# Altium PCB EtherWiz_RiscPC7K.PcbDoc (part 1 of 2)
Units mil, origin at the board's own origin, x right, y up, seen from the top; angles counter-clockwise.
Board outline 2881.89 x 2411.42 mil, 4 copper layers (Top Layer, 5V, GND, Bottom Layer), stack 81.148 mil thick; 69 components, 129 nets, 423 pads, 162 vias.
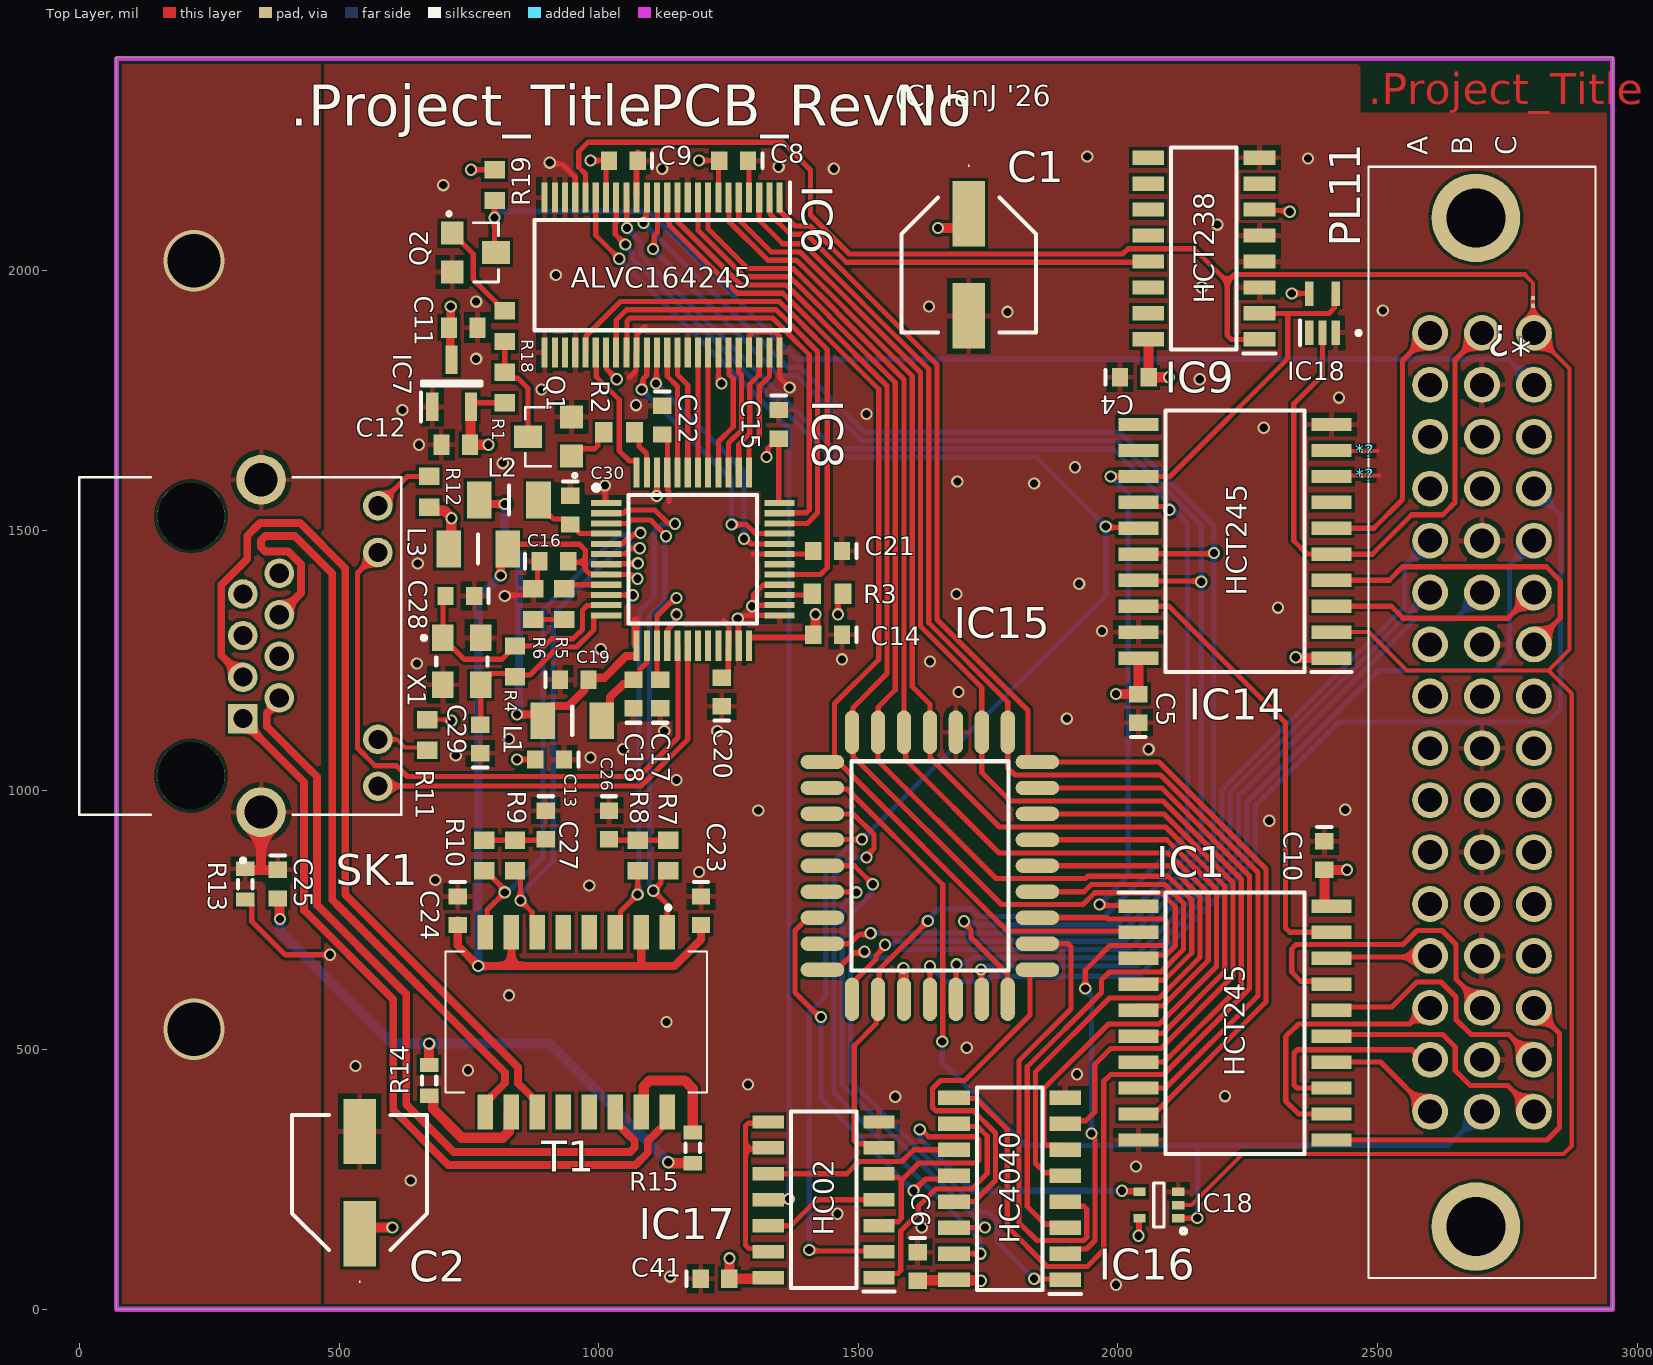
[diagram p0: Top Layer view]
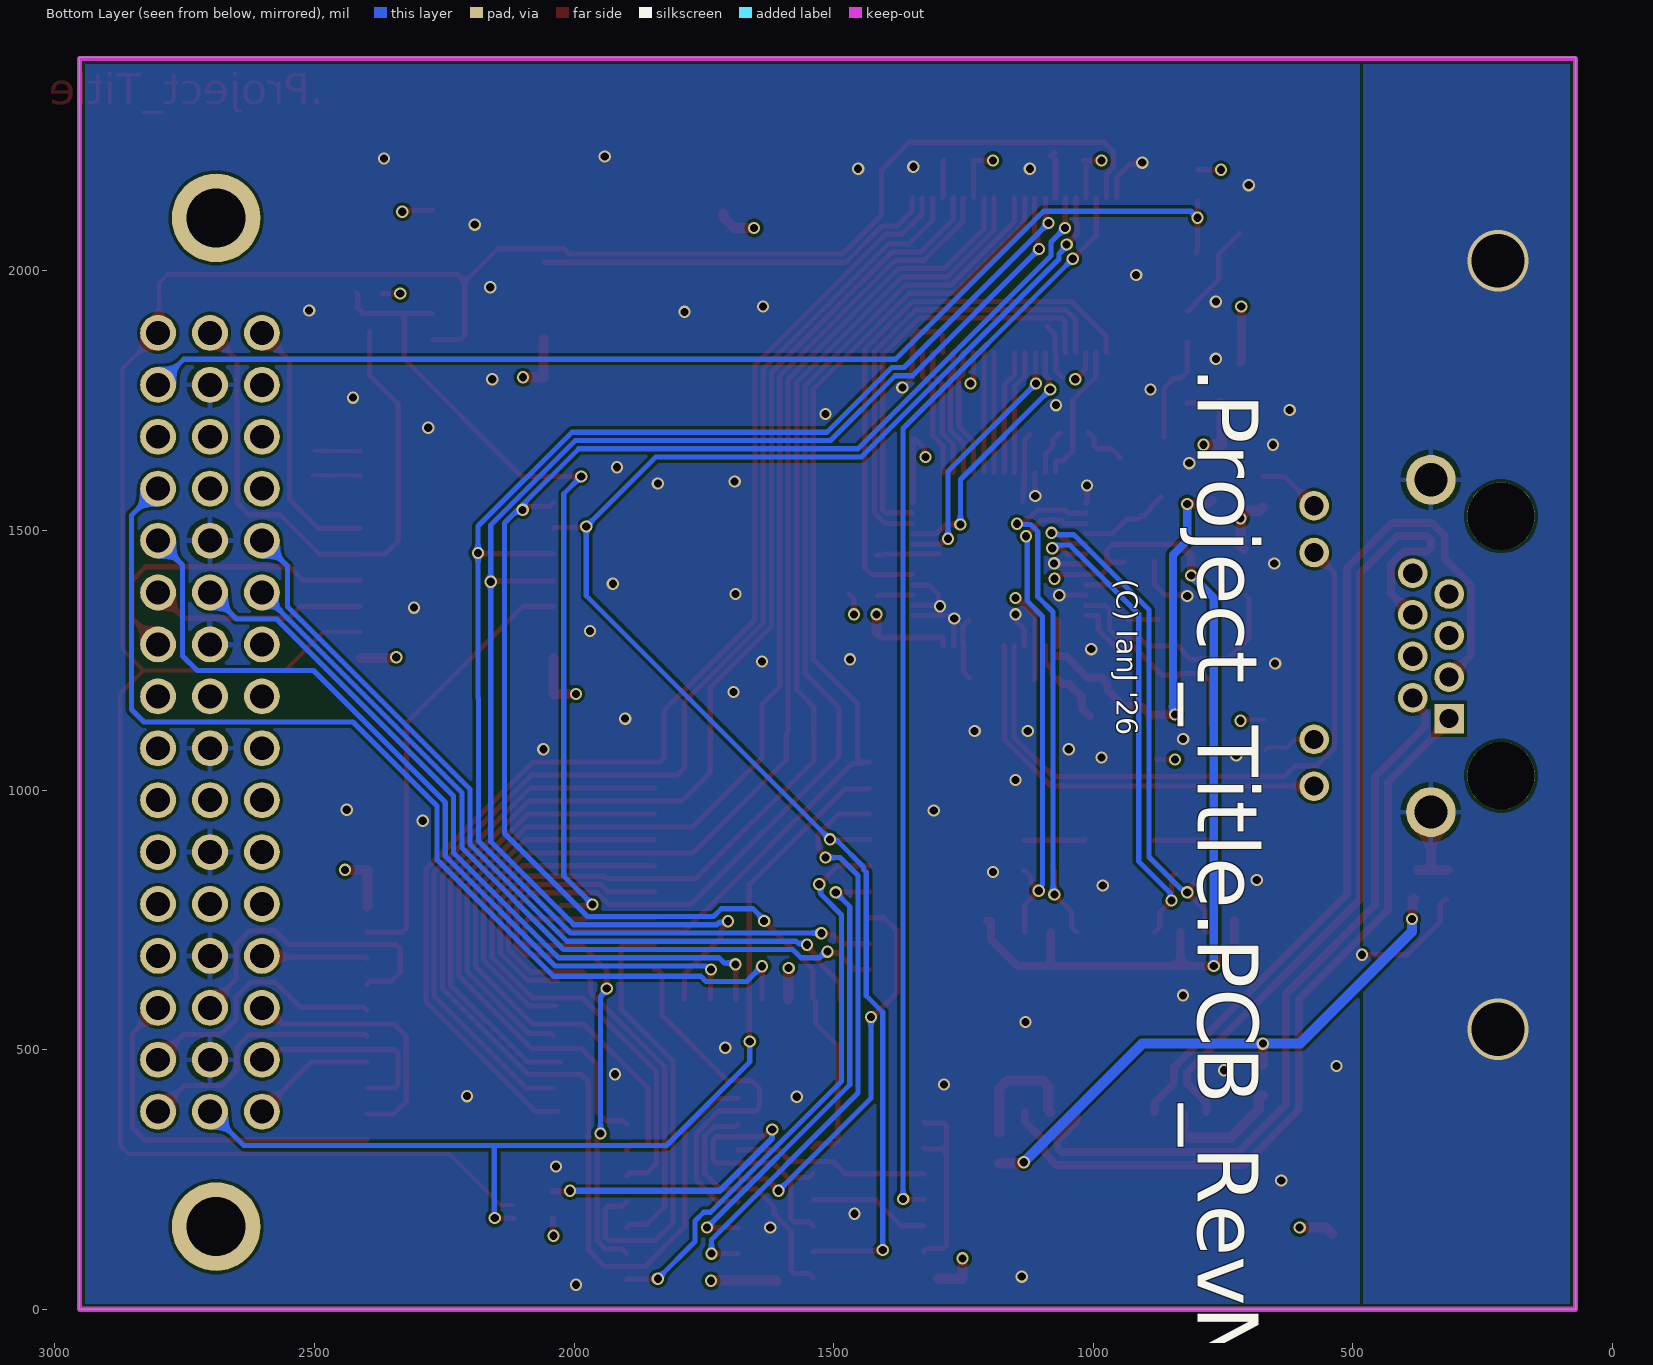
[diagram p1: Bottom Layer view, seen from below]
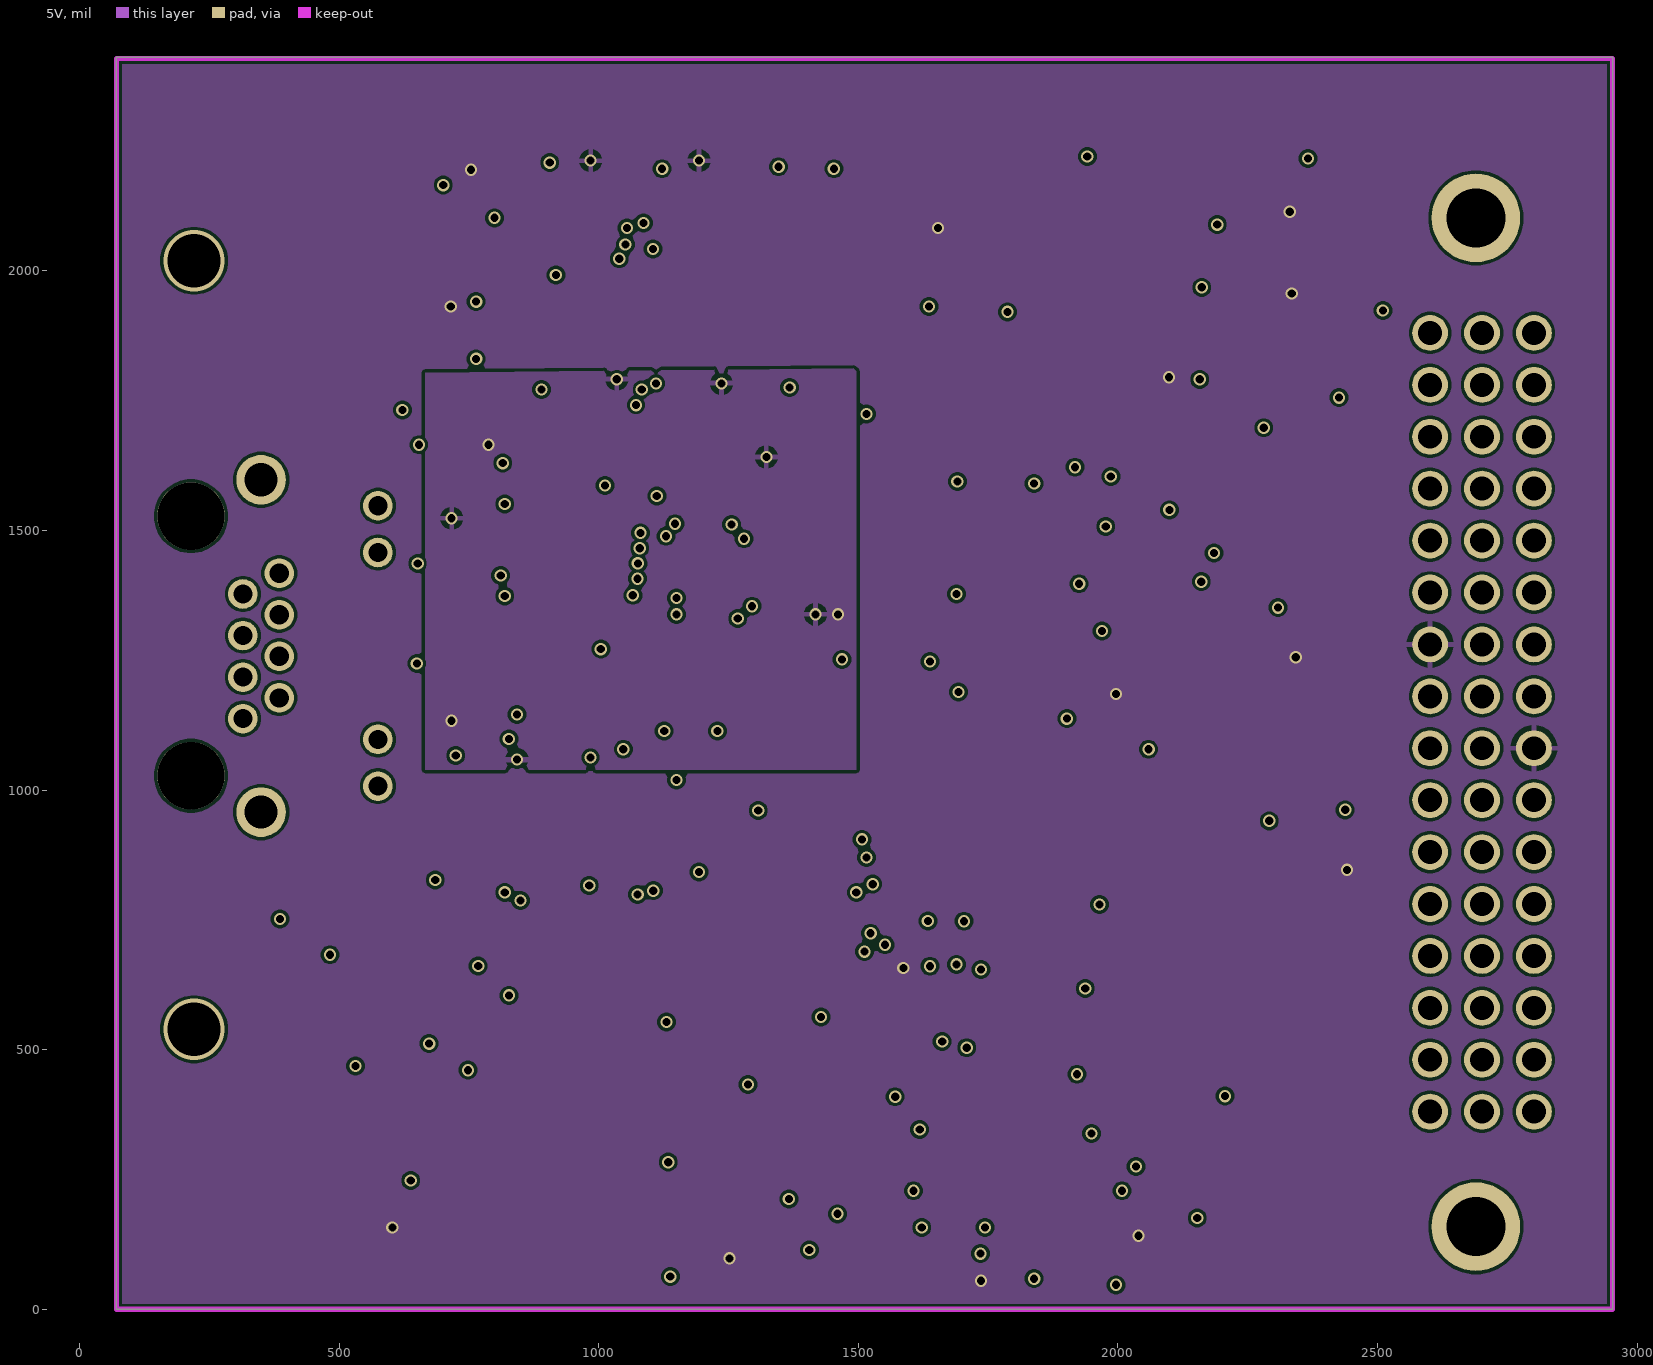
[diagram p2: 5V]
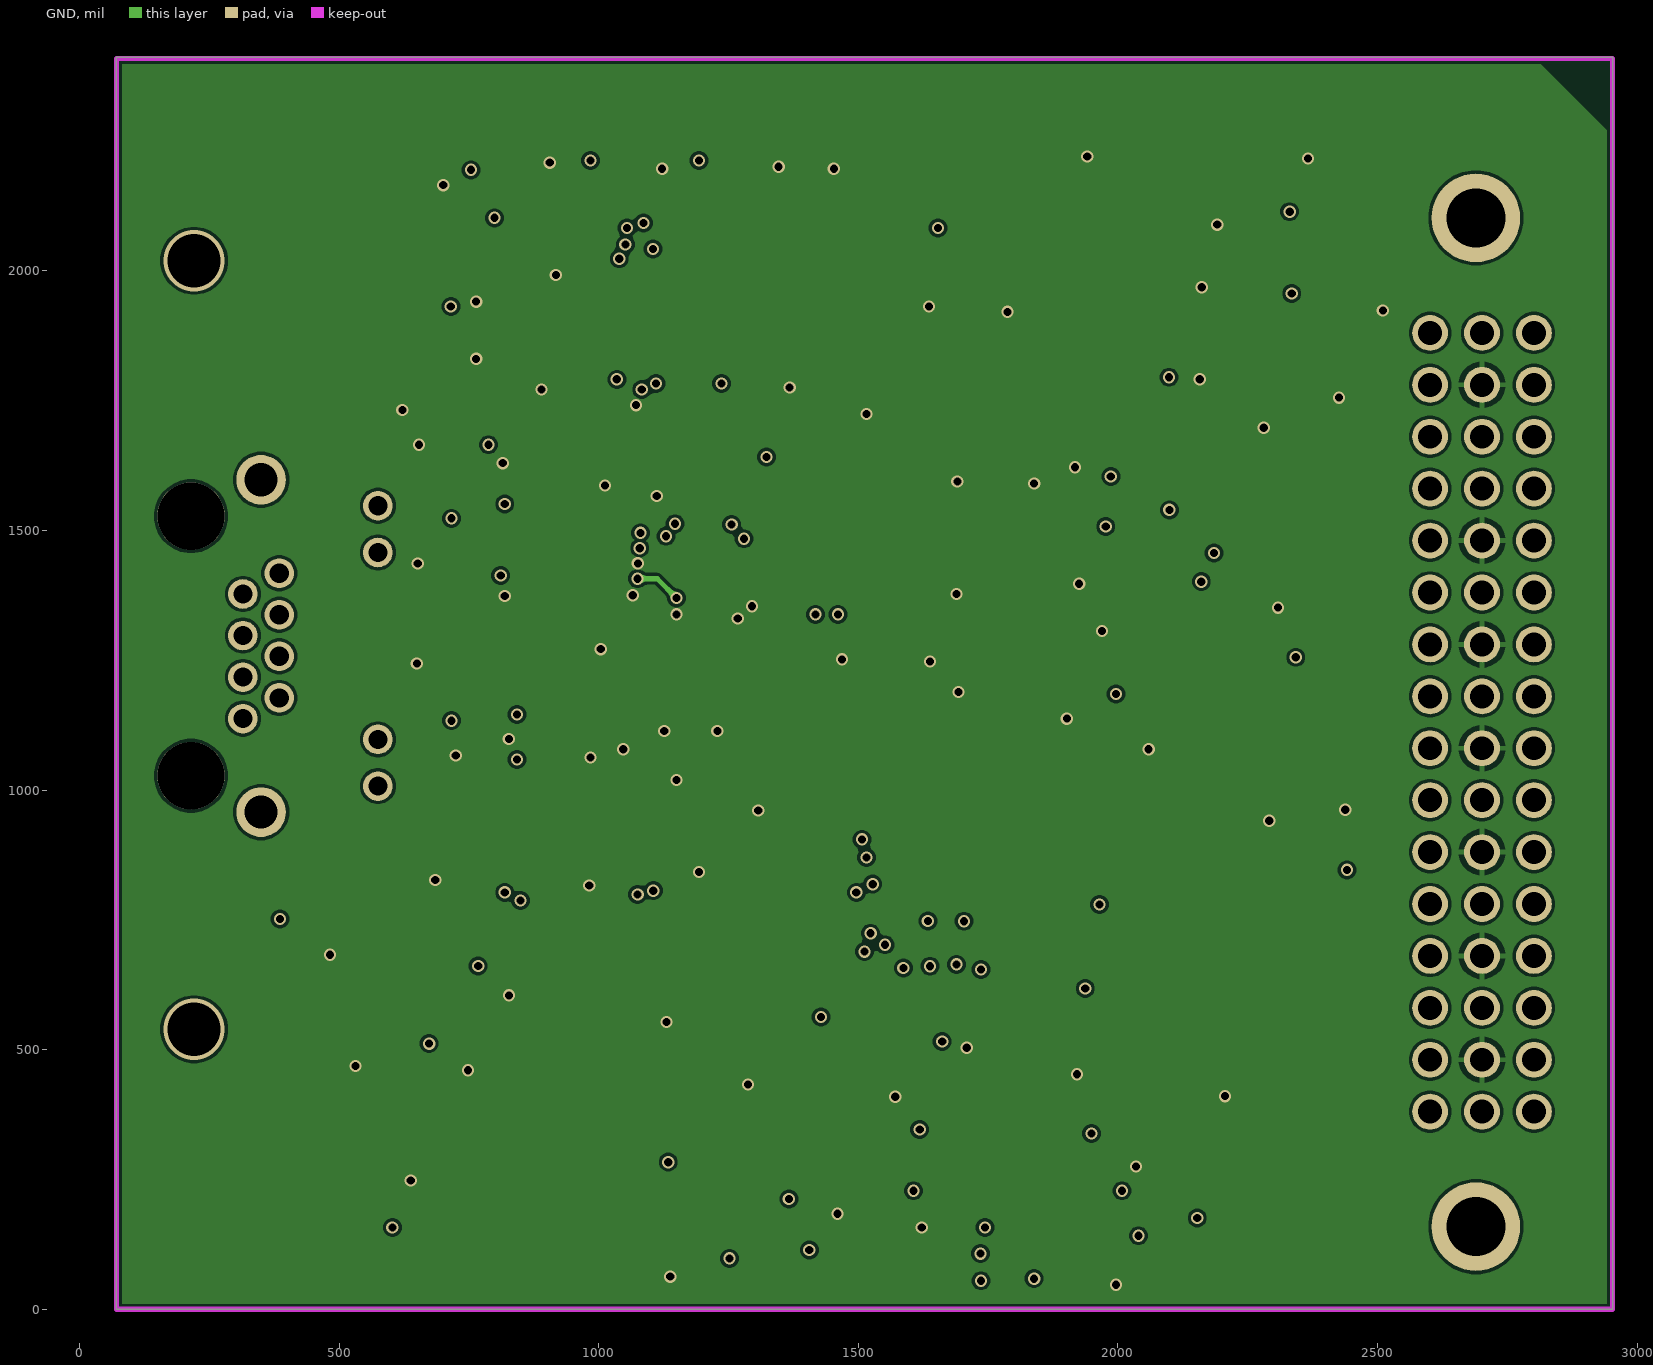
[diagram p3: GND]
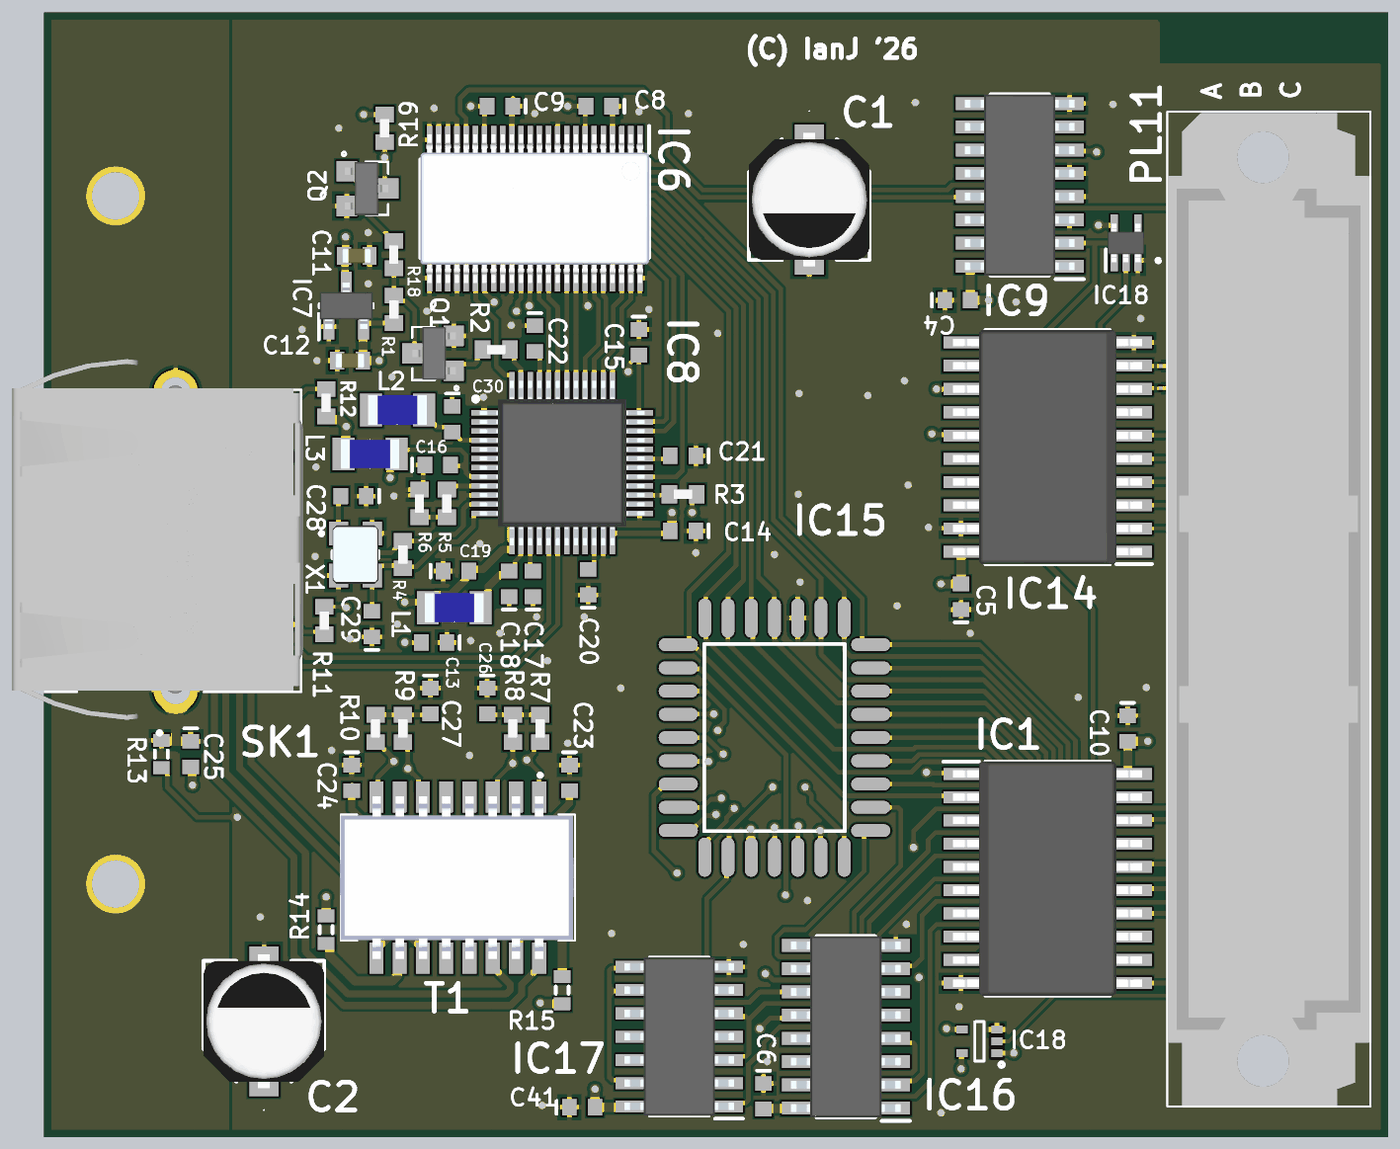
[diagram p5: 3D render of the assembled board from above, using the file's embedded part models]

## Layer stack, top to bottom
Top Solder: solder mask 0.4, Solder Resist, Dk 3.5
Top Layer: signal copper 1.4
Dielectric 1: dielectric 7.874, FR-4, Dk 4.8
5V: signal copper 1.378
Dielectric 2: core 47.2441, PP-006, Dk 4.1
Dielectric2: dielectric 7.874, FR-4, Dk 4.8
GND: signal copper 1.378
Dielectric4: dielectric 12.6, FR-4, Dk 4.8
Bottom Layer: signal copper 1.4
Bottom Solder: solder mask 0.4, Solder Resist, Dk 3.5

## Board outline
70.87,0 70.87,2411.42 2952.76,2411.42 2952.76,0

## Design rules (kind name [scope] priority, off if disabled: settings)
Clearance [All] p1: gap=5.91 ignorepadtopadclearanceinfootprint=FALSE
DiffPairsRouting [All] p1: maxlimit=10 minlimit=10 mostfreqgap=10 toplayer_minwidth=15 toplayer_maxwidth=15 toplayer_prefwidth=15 midlayer1_minwidth=15 midlayer1_maxwidth=15 midlayer1_prefwidth=15 midlayer2_minwidth=15 midlayer2_maxwidth=15 midlayer2_prefwidth=15 bottomlayer_minwidth=15 bottomlayer_maxwidth=15 bottomlayer_prefwidth=15 maxuncoupledlength=500
HoleSize [All] p1: absolutevalues=TRUE maxlimit=196.85 minlimit=1 maxpercent=80.000 minpercent=20.000
MinimumSolderMaskSliver [All] p1: minsoldermaskwidth=0.79
PolygonConnect [All] p1: connectstyle=Relief reliefconductorwidth=10 reliefentries=4 polygonreliefangle="90 Angle" airgapwidth=10
RoutingVias [All] p1: holewidth=15.75 width=23.62 viastyle="Through Hole" minholewidth=15.75 minwidth=23.62 maxholewidth=28 maxwidth=50
SilkToSilkClearance [All] p1 off: silktosilkclearance=10
SilkToSolderMaskClearance [IsPad] p1 off: minsilkscreentomaskgap=10 clearancetoexposedcopper=TRUE
SolderMaskExpansion [All] p1: expansion=4 istentingtop=FALSE
SupplyNets "Schematic Supply Nets_8" [InNet('GND_CHASS')] p1: voltage=0.000
SupplyNets "Schematic Supply Nets_7" [InNet('1v2a')] p2: voltage=0.000
SupplyNets "Schematic Supply Nets_6" [InNet('3v3a')] p3: voltage=0.000
SupplyNets "Schematic Supply Nets_5" [InNet('5V')] p4: voltage=0.000
SupplyNets "Schematic Supply Nets_4" [InNet('1v2o')] p5: voltage=0.000
SupplyNets "Schematic Supply Nets_3" [InNet('3v3')] p6: voltage=0.000
SupplyNets "Schematic Supply Nets_2" [InNet('1v2d')] p7: voltage=0.000
SupplyNets "Schematic Supply Nets" [InNet('GND')] p8: voltage=0.000
Width [All] p1: maxlimit=19.68 minlimit=7.87 preferedwidth=10 midlayer1_maxwidth=10 midlayer2_maxwidth=10 minimp=50.000000 maximp=50.000000 favimp=50.000000
25 further rules are at their usual default settings.

## Classes and differential pairs
component class EtherWiz_RiscPC7K: *? IC15 IC16 IC17 IC18 PL11
component class EtherWiz_Controller: C6 C11 C12 C13 C14 C15 C16 C17 C18 C19 C20 C21 C22 C23 C24 C25 C26 C27 C28 C29 C30 IC6 IC7 IC8 L1 L2 L3 Q1 Q2 R1 R2 R3 R4 R5 R6 R7 R8 R9 R10 R11 R12 R13 R14 R15 R18 R19 SK1 T1 X1
component class EtherWiz: C1 C2 C4 C5 C8 C9 C10 C41 IC1 IC9 IC14
differential pair TX: +TX_P -TX_N
differential pair RX: +RX_P -RX_N
differential pair ETX: +ETX_P -ETX_N
differential pair ERX: +ERX_P -ERX_N

## Components (designator, comment, footprint, x,y, rotation, side; value= is the part's Value field where it differs from the comment)
*? "NetTie" nettie 2799.21,1948.07 r180 top net-tie
*? "NetTie" nettie 2483.5,1606.3 r90 top net-tie
*? "NetTie" nettie 2483.5,1653.54 r90 top net-tie
C1 "EEE-HA1C470AP" EEE1AA101SP 1712.6,2011.81 r270 top
C2 "EEE-HA1C470AP" EEE1AA101SP 539.37,244.09 r90 top
C4 "100n" CAPC1608L 2031.5,1795.28 r0 top
C5 "100n" CAPC1608L 2039.37,1157.48 r90 top
C6 "100n" CAPC1608L 1614.17,82.68 r270 top
C8 "100n" CAPC1608L 1259.84,2212.6 r180 top
C9 "100n" CAPC1608L 1047.24,2212.6 r180 top
C10 "100n" CAPC1608L 2397.64,874.02 r270 top
C11 "1uF" CAPC1608X90N 738.98,1890.88 r180 top
C12 "1uF" CAPC1608X90N 724.41,1665.35 r0 top
C13 "100n" CAPC1608L 905.51,1059.06 r180 top
C14 "100n" CAPC1608L 1440.94,1299.21 r180 top
C15 "100n" CAPC1608L 1346.46,1704.72 r270 top
C16 "100n" CAPC1608L 913.39,1440.94 r0 top
C17 "100n" CAPC1608L 1118.11,1185.04 r90 top
C18 "100nF" CAPC1608L 1066.93,1185.04 r90 top
C19 "100nF" CAPC1608L 952.76,1212.6 r0 top
C20 "100nF" CAPC1608L 1236.81,1188.92 r90 top
C21 "100nF" CAPC1608L 1440.94,1460.63 r180 top
C22 "100nF" CAPC1608L 1122.05,1712.6 r270 top
C23 "100nF" CAPC1608L 1196.85,767.72 r270 top
C24 "100nF" CAPC1608L 728.35,767.72 r270 top
C25 "1nF" CAPC1608L 381.89,818.9 r270 top
C26 "100nF" CAPC1608L 1019.69,933.07 r270 top
C27 "100nF" CAPC1608L 897.64,933.07 r270 top
C28 "24pF" CAPC1608L 732.28,1374.02 r180 top
C29 "24pF" CAPC1608L 771.65,1098.43 r90 top
C30 "100nF" CAPC1608L 944.88,1539.37 r270 top
C41 "100n" CAPC1608L 1224.02,59.06 r0 top
IC1 "SN74HCT245DWR" SOIC127P1030X265-20N 2225.39,551.18 r0 top
IC6 "74ALVC164245DGG_11" SOP50P810X120-48N 1122.05,1992.13 r270 top
IC7 "MCP1703AT-3302E_CB" SOT95P255X145-3N 716.54,1783.46 r90 top
IC8 "W6100L" QFP50P900X900X160-48N 1181.1,1444.88 r0 top locked
IC9 "CD74HCT238M96" SOIC127P600X175-16N 2165.35,2043.31 r180 top
IC14 "SN74HCT245DWR" SOIC127P1030X265-20N 2225.39,1479.33 r180 top
IC15 "SST39SF040" PLCC127P1245X1499X356-32N 1637.8,854.33 r180 top locked
IC16 "74HC4040D,652" SOIC127P600X175-16N 1791.34,232.28 r180 top
IC17 "74HC02D,652" SOIC127P600X175-14N 1433.09,211.02 r180 top
IC18 "74LVC1G08" SOT353 2078.74,200.79 r180 top
IC18 "SN74LVC1G04DCKR" SOT65P210X110-5N 2393.89,1918.65 r90 top
L1 "782763800" INDC3216X130N 948.82,1133.86 r180 top
L2 "782763800" INDC3216X130N 826.77,1559.06 r0 top
L3 "782763800" INDC3216X130N 767.72,1464.57 r0 top
PL11 "5650479-5" 56504795 2601.18,1880.71 r90 top locked
Q1 "BC846" SOT-23 905.51,1681.1 r90 top
Q2 "BC846" SOT-23 759.84,2035.43 r270 top
R1 "100K" RESC1608X50N 818.9,1775.59 r270 top
R2 "2K2" RESC1608X50N 1039.37,1688.98 r180 top
R3 "2K2" RESC1608X50N 1440.94,1377.95 r0 top
R4 "1M" RESC1608X50N 838.58,1248.03 r90 top
R5 "12K" RESC1608X50N 933.07,1358.27 r90 top
R6 "300R" RESC1608X50N 874.02,1358.27 r270 top
R7 "50R" RESC1608X50N 1133.86,874.02 r270 top
R8 "50R" RESC1608X50N 1074.8,874.02 r270 top
R9 "50R" RESC1608X50N 838.58,874.02 r270 top
R10 "50R" RESC1608X50N 779.53,874.02 r270 top
R11 "300R" RESC1608X50N 669.29,1106.3 r90 top
R12 "300R" RESC1608X50N 673.23,1574.8 r270 top
R13 "0R" RESC1608L 318.9,818.9 r90 top
R14 "75R" RESC1608L 673.23,440.94 r270 top
R15 "75R" RESC1608L 1181.1,311.02 r90 top
R18 "2K2" RESC1608X50N 818.9,1893.7 r90 top
R19 "100K" RESC1608X50N 799.21,2165.35 r90 top
SK1 "RJHSE5480" AMPHENOL_RJHSE5480 214.57,1277.76 r270 top locked
T1 "PT61017PEL" PT61017PEL 956.69,578.74 r180 top locked
X1 "25MHz" ABM810000MHZ12D2W 736.22,1248.03 r270 top

## Footprints (in the part's own frame and the unit in brackets; to place one, negate y for a bottom-side part, rotate by r counter-clockwise, add the part's x,y. Pads: shape width x height; smd on the part's side, far side on the other; paste and mask are expansions set on the pad)
56504795 [mm]
  round 1.755 hole 1.17: A1(0,0) A2(-2.54,0) A3(-5.08,0) A4(-7.62,0) A5(-10.16,0) A6(-12.7,0) A7(-15.24,0) A8(-17.78,0) A9(-20.32,0) A10(-22.86,0) A11(-25.4,0) A12(-27.94,0) A13(-30.48,0) A14(-33.02,0) A15(-35.56,0) A16(-38.1,0) B1(0,-2.54) B2(-2.54,-2.54) B3(-5.08,-2.54) B4(-7.62,-2.54) B5(-10.16,-2.54) B6(-12.7,-2.54) B7(-15.24,-2.54) B8(-17.78,-2.54) B9(-20.32,-2.54) B10(-22.86,-2.54) B11(-25.4,-2.54) B12(-27.94,-2.54) B13(-30.48,-2.54) B14(-33.02,-2.54) B15(-35.56,-2.54) B16(-38.1,-2.54) C1(0,-5.08) C2(-2.54,-5.08) C3(-5.08,-5.08) C4(-7.62,-5.08) C5(-10.16,-5.08) C6(-12.7,-5.08) C7(-15.24,-5.08) C8(-17.78,-5.08) C9(-20.32,-5.08) C10(-22.86,-5.08) C11(-25.4,-5.08) C12(-27.94,-5.08) C13(-30.48,-5.08) C14(-33.02,-5.08) C15(-35.56,-5.08) C16(-38.1,-5.08)
  round 4.335 hole 2.89: MH1(-43.725,-2.24) MH2(5.625,-2.24)
  silkscreen extent -46.23,-8.09 8.13,3.6, body extent -46.17,-8.05 8.07,2.97, height 11.57
ABM810000MHZ12D2W [mm]
  rect 1.3x1.05 smd: 1(-1.15,-0.925) 2(1.15,-0.925) 3(1.15,0.925) 4(-1.15,0.925)
  silkscreen extent -1.25,-1.95 0.2,1.25, body extent -1.6,-1.25 1.6,1.25, height 0.8
AMPHENOL_RJHSE5480 [mm]
  rect 1.448x1.448 / inner round 1.448 / far side rect 1.448x1.448 hole 0.94: 1(3.556,2.54)
  round 1.448 hole 0.94: 2(2.54,4.318) 3(1.524,2.54) 4(0.508,4.318) 5(-0.508,2.54) 6(-1.524,4.318) 7(-2.54,2.54) 8(-3.556,4.318) 9(6.858,9.144) 10(4.572,9.144) 11(-4.572,9.144) 12(-6.858,9.144)
  round 2.43 hole 1.62: S1(-8.13,3.43) S2(8.13,3.43)
  round 3.3 hole 3.3 unplated: ""(-6.35,0) ""(6.35,0)
  silkscreen extent -8.26,-5.46 10.6,10.29, body extent -9.93,-5.49 9.78,10.41, height 15.19
CAPC1608L [mm] "Chip Capacitor, Body 1.6x0.8mm, IPC High Density"
  rect 0.8x0.9 smd: 1(-0.7,0) 2(0.7,0)
  silkscreen extent -1.4,-0.35 -1.4,0.35, body extent -0.87,-0.48 0.87,0.48, height 0.85
CAPC1608X90N [mm]
  rect 0.78x0.99 smd: 1(-0.7,0) 2(0.7,0)
  body extent -0.8,-0.41 0.8,0.41, height 0.9
EEE1AA101SP [mm]
  rect 3.2x1.6 smd: 1(-2.5,0) 2(2.5,0)
  silkscreen extent -4.88,-3.3 3.3,3.3, body extent 0,0 0,0
INDC3216X130N [mm]
  rect 1.2x1.8 smd: 1(-1.45,0) 2(1.45,0)
  silkscreen extent 0,-0.7 0,0.7, body extent -1.6,-0.8 1.6,0.8, height 1.3
nettie [mm]
  rect 0.2x0.2 smd: 1(0,0) 2(0,0.381)
  Top Layer region: -0.102,0.356 -0.102,0.025 0.102,0.025 0.102,0.356
PLCC127P1245X1499X356-32N [mm]
  rrect100% 0.7x2.134 smd: 1(0,6.533) 2(-1.27,6.533) 3(-2.54,6.533) 4(-3.81,6.533) 14(-3.81,-6.533) 15(-2.54,-6.533) 16(-1.27,-6.533) 17(0,-6.533) 18(1.27,-6.533) 19(2.54,-6.533) 20(3.81,-6.533) 30(3.81,6.533) 31(2.54,6.533) 32(1.27,6.533)
  rrect100% 2.134x0.7 smd: 5(-5.258,5.08) 6(-5.258,3.81) 7(-5.258,2.54) 8(-5.258,1.27) 9(-5.258,0) 10(-5.258,-1.27) 11(-5.258,-2.54) 12(-5.258,-3.81) 13(-5.258,-5.08) 21(5.258,-5.08) 22(5.258,-3.81) 23(5.258,-2.54) 24(5.258,-1.27) 25(5.258,0) 26(5.258,1.27) 27(5.258,2.54) 28(5.258,3.81) 29(5.258,5.08)
  silkscreen extent -3.84,-5.12 3.84,5.12
PT61017PEL [mm]
  rect 0.76x1.7 smd: 1(-4.445,-3.75) 2(-3.175,-3.75) 3(-1.905,-3.75) 4(-0.635,-3.75) 5(0.635,-3.75) 6(1.905,-3.75) 7(3.175,-3.75) 8(4.445,-3.75) 9(4.445,5.05) 10(3.175,5.05) 11(1.905,5.05) 12(0.635,5.05) 13(-0.635,5.05) 14(-1.905,5.05) 15(-3.175,5.05) 16(-4.445,5.05)
  silkscreen extent -6.4,-5.05 6.4,4.1, body extent -6.33,-3.8 6.45,5.1, height 5.14
QFP50P900X900X160-48N [mm]
  rect 1.475x0.3 smd: 1(-4.238,2.75) 2(-4.238,2.25) 3(-4.238,1.75) 4(-4.238,1.25) 5(-4.238,0.75) 6(-4.238,0.25) 7(-4.238,-0.25) 8(-4.238,-0.75) 9(-4.238,-1.25) 10(-4.238,-1.75) 11(-4.238,-2.25) 12(-4.238,-2.75) 25(4.238,-2.75) 26(4.238,-2.25) 27(4.238,-1.75) 28(4.238,-1.25) 29(4.238,-0.75) 30(4.238,-0.25) 31(4.238,0.25) 32(4.238,0.75) 33(4.238,1.25) 34(4.238,1.75) 35(4.238,2.25) 36(4.238,2.75)
  rect 0.3x1.475 smd: 13(-2.75,-4.238) 14(-2.25,-4.238) 15(-1.75,-4.238) 16(-1.25,-4.238) 17(-0.75,-4.238) 18(-0.25,-4.238) 19(0.25,-4.238) 20(0.75,-4.238) 21(1.25,-4.238) 22(1.75,-4.238) 23(2.25,-4.238) 24(2.75,-4.238) 37(2.75,4.238) 38(2.25,4.238) 39(1.75,4.238) 40(1.25,4.238) 41(0.75,4.238) 42(0.25,4.238) 43(-0.25,4.238) 44(-0.75,4.238) 45(-1.25,4.238) 46(-1.75,4.238) 47(-2.25,4.238) 48(-2.75,4.238)
  silkscreen extent -4.85,-3.15 3.15,3.62, body extent -4.5,-4.5 4.5,4.5, height 1.6
RESC1608L [mm] "Chip Resistor, Body 1.6x0.8mm, IPC High Density"
  rect 0.7x0.9 smd: 1(-0.75,0) 2(0.75,0)
  silkscreen extent -0.2,-0.35 0.2,0.35, body extent -0.8,-0.41 0.8,0.41, height 0.45
RESC1608X50N [mm]
  rect 0.85x1 smd: 1(-0.75,0) 2(0.75,0)
  body extent -0.5,-0.25 0.5,0.25, height 0.35
SOIC127P600X175-14N [mm]
  rect 1.525x0.65 smd: 1(-2.712,3.81) 2(-2.712,2.54) 3(-2.712,1.27) 4(-2.712,0) 5(-2.712,-1.27) 6(-2.712,-2.54) 7(-2.712,-3.81) 8(2.712,-3.81) 9(2.712,-2.54) 10(2.712,-1.27) 11(2.712,0) 12(2.712,1.27) 13(2.712,2.54) 14(2.712,3.81)
  silkscreen extent -3.47,-4.33 1.6,4.48, body extent -3,-4.33 3,4.33, height 1.75
SOIC127P600X175-16N [mm]
  rect 1.55x0.7 smd: 1(-2.725,4.445) 2(-2.725,3.175) 3(-2.725,1.905) 4(-2.725,0.635) 5(-2.725,-0.635) 6(-2.725,-1.905) 7(-2.725,-3.175) 8(-2.725,-4.445) 9(2.725,-4.445) 10(2.725,-3.175) 11(2.725,-1.905) 12(2.725,-0.635) 13(2.725,0.635) 14(2.725,1.905) 15(2.725,3.175) 16(2.725,4.445)
  silkscreen extent -3.5,-4.95 1.6,5.15, body extent -3,-4.95 3,4.95, height 1.75
SOIC127P1030X265-20N [mm]
  rect 1.95x0.65 smd: 1(-4.725,5.715) 2(-4.725,4.445) 3(-4.725,3.175) 4(-4.725,1.905) 5(-4.725,0.635) 6(-4.725,-0.635) 7(-4.725,-1.905) 8(-4.725,-3.175) 9(-4.725,-4.445) 10(-4.725,-5.715) 11(4.725,-5.715) 12(4.725,-4.445) 13(4.725,-3.175) 14(4.725,-1.905) 15(4.725,-0.635) 16(4.725,0.635) 17(4.725,1.905) 18(4.725,3.175) 19(4.725,4.445) 20(4.725,5.715)
  silkscreen extent -5.7,-6.4 3.4,6.4, body extent -5.16,-6.4 5.16,6.4, height 1.75
SOP50P810X120-48N [mm]
  rect 1.475x0.3 smd: 1(-3.788,5.75) 2(-3.788,5.25) 3(-3.788,4.75) 4(-3.788,4.25) 5(-3.788,3.75) 6(-3.788,3.25) 7(-3.788,2.75) 8(-3.788,2.25) 9(-3.788,1.75) 10(-3.788,1.25) 11(-3.788,0.75) 12(-3.788,0.25) 13(-3.788,-0.25) 14(-3.788,-0.75) 15(-3.788,-1.25) 16(-3.788,-1.75) 17(-3.788,-2.25) 18(-3.788,-2.75) 19(-3.788,-3.25) 20(-3.788,-3.75) 21(-3.788,-4.25) 22(-3.788,-4.75) 23(-3.788,-5.25) 24(-3.788,-5.75) 25(3.788,-5.75) 26(3.788,-5.25) 27(3.788,-4.75) 28(3.788,-4.25) 29(3.788,-3.75) 30(3.788,-3.25) 31(3.788,-2.75) 32(3.788,-2.25) 33(3.788,-1.75) 34(3.788,-1.25) 35(3.788,-0.75) 36(3.788,-0.25) 37(3.788,0.25) 38(3.788,0.75) 39(3.788,1.25) 40(3.788,1.75) 41(3.788,2.25) 42(3.788,2.75) 43(3.788,3.25) 44(3.788,3.75) 45(3.788,4.25) 46(3.788,4.75) 47(3.788,5.25) 48(3.788,5.75)
  silkscreen extent -4.52,-6.25 2.7,6.25, body extent -4.06,-6.25 4.06,6.25, height 1
SOT65P210X110-5N [mm]
  rect 1.2x0.4 smd: 1(-0.95,0.65) 2(-0.95,0) 3(-0.95,-0.65) 4(0.95,-0.65) 5(0.95,0.65)
  silkscreen extent -1.55,1.1 -0.35,1.1, body extent -1.05,-1 1.05,1, height 1
SOT95P255X145-3N [mm]
  rect 1.4x0.6 smd: 1(-1.15,0.95) 2(-1.15,-0.95) 3(1.15,0)
  silkscreen extent -1.85,-1.45 0.1,1.5, body extent -1.28,-1.45 1.28,1.45, height 1.45
SOT353 [mm] "SOT353, 5-Leads, Body 2.15x1.3mm, Pitch 0.65mm, Lead Span 2.1mm"
  rect 0.6x0.42 smd mask+0.15: 1(-0.95,0.65) 2(-0.95,0) 3(-0.95,-0.65)
  rect 0.6x0.42 smd: 4(0.95,-0.65) 5(0.95,0.65)
  silkscreen extent -1.33,-1.08 0.25,1.39, body extent -0.7,-1.1 0.7,1.1, height 1
SOT-23 [mil]
  rect 44x44 smd: 1(-37.5,-42) 2(37.5,-42)
  rect 44x54 smd: 3(-0.25,42)
  silkscreen extent -79,-52 57,47, body extent -57,-47 57,47, height 40

## Part data
C1 C2: "Capacitor Polarised", Manufacturer_Name=Panasonic, Mouser Part Number=667-EEE-HA1C470AP, Arrow Part Number=EEE-HA1C470AP, Arrow Price/Stock=https://www.arrow.com/en/products/eeeha1c470ap/panasonic?utm_currency=USD&region=europe, Datasheet Link=http://industrial.panasonic.com/cdbs/www-data/pdf/RDE0000/ABA0000C1148.pdf, Height=7.8mm, Manufacturer_Part_Number=EEE-HA1C470AP, Mouser Price/Stock=https://www.mouser.co.uk/ProductDetail/Panasonic/EEE-HA1C470AP?qs=d1CqaRUMZD%2FL5qU1hDRerg%3D%3D
C4 C5 C6 C8 C9 C10 C13 C14 C15 C16 C17 C41: library part CAP_100n_0603_50V_0, "CAP 100nF, 0603, 50V, X7R, 10%", Distributor1 Part No=CL10B104KB8NNNC, Distributor2 Part No=311-1344-2-ND, Manufacturer1=Samsung, Manufacturer2=Yageo, Voltage=50V, ComponentLink1Description=ComponentLinknURL1, ComponentLink1URL=https://media.digikey.com/pdf/Data%20Sheets/Samsung%20PDFs/CL_Series_MLCC_ds.pdf, ComponentLink2Description=ComponentLinknURL2, ComponentLink2URL=https://www.yageo.com/upload/media/product/productsearch/datasheet/mlcc/UPY-GPHC_X7R_6.3V-to-50V_18.pdf, Distributor1=Anglia, Distributor2=Digikey, ManuPart1=CL10B104KB8NNNC, ManuPart2=CC0603KRX7R9BB104
C11 C12: library part CL10A105KP8NNNC, "Capacitor", Manufacturer_Name=SAMSUNG, Mouser Part Number=187-CL10A105KP8NNNC, Arrow Part Number=CL10A105KP8NNNC, Arrow Price/Stock=https://www.arrow.com/en/products/cl10a105kp8nnnc/samsung-electro-mechanics?utm_currency=USD&region=nac, Datasheet Link=https://datasheet.lcsc.com/szlcsc/Samsung-Electro-Mechanics-CL10A105KP8NNNC_C26413.pdf, Height=0.9mm, Manufacturer_Part_Number=CL10A105KP8NNNC, Mouser Price/Stock=https://www.mouser.co.uk/ProductDetail/Samsung-Electro-Mechanics/CL10A105KP8NNNC?qs=349EhDEZ59qtu6tL%2F73n2A%3D%3D
C18 C19 C20 C21 C22 C30: library part 100nF0805, "Capacitor", Arrow Part Number=C2012X7R1H104K125AM, LCSC Part #=C111492, Manufacturer_Name=TDK, Mouser Part Number=810-C2012X7R1H104KT5, Arrow Price/Stock=https://www.arrow.com/en/products/c2012x7r1h104k125am/tdk, Datasheet Link=https://product.tdk.com/info/en/catalog/datasheets/mlcc_commercial_midvoltage_en.pdf, Height=1.45mm, Manufacturer_Part_Number=C2012X7R1H104K125AM, Mouser Price/Stock=https://www.mouser.com/Search/Refine.aspx?Keyword=810-C2012X7R1H104KT5
C23 C24 C26 C27: library part 909-0001-L, "Cap ceramic X7R/X5R 100nF 10% 16V C0603", Disti Part Number=432-210, LCSC Part #=C66501, Manufacturer=EPCOS, Tolerance=0.1, Voltage=16V, Component Type=Standard, Construction=X7R, Cost(£)=0.038, Distributer=Farnell, ManuPart=B37931-K9104-K60, Qualified2ndManu=Yageo, Qualified2ndPart=CC0603KRX7R7BB104, RoHS Compliant=YES
C25: library part 910-0053-L, "Cap ceramic X7R 1nF 10% 2kV C1206", Disti Part Number=1206GC102KAT1A, LCSC Part #=C23631, Manufacturer=AVX, Tolerance=0.1, Voltage=2000V, Component Type=Standard, Construction=X7R, Cost(£)=0.187, Distributer=Anglia, ManuPart=1206GC102KAT1A, RoHS Compliant=YES
C28 C29: library part CAP_10P_0603_50V_0, "CAP 10PF, 0603, 50V, NP0, 10%"
IC1 IC14: "Integrated Circuit", Manufacturer_Name="Texas Instruments", Mouser Part Number=595-SN74HCT245DWR, Arrow Part Number=SN74HCT245DWR, Arrow Price/Stock=https://www.arrow.com/en/products/sn74hct245dwr/texas-instruments?region=nac, Datasheet Link=https://datasheet.datasheetarchive.com/originals/distributors/SFDatasheet-6/sf-000131457.pdf, Height=2.65mm, Manufacturer_Part_Number=SN74HCT245DWR, Mouser Price/Stock=https://www.mouser.co.uk/ProductDetail/Texas-Instruments/SN74HCT245DWR?qs=st7IWvlL5%2FhHLMwvvkYTgw%3D%3D
IC6: "Integrated Circuit", Arrow Part Number=74ALVC164245DGG:11, Manufacturer_Name=Nexperia, Mouser Part Number=771-74ALVC164245, Arrow Price/Stock=https://www.arrow.com/en/products/74alvc164245dgg11/nexperia?utm_currency=USD&region=nac, Datasheet Link=https://assets.nexperia.com/documents/data-sheet/74ALVC164245.pdf, Height=1.2mm, Manufacturer_Part_Number=74ALVC164245DGG:11, Mouser Price/Stock=https://www.mouser.co.uk/ProductDetail/Nexperia/74ALVC164245DGG11?qs=odJ8N4Y39o4j0ykFPcnqaQ%3D%3D
IC7: "Integrated Circuit", Arrow Part Number=MCP1703AT-3302E/CB, Manufacturer_Name=Microchip, Mouser Part Number=579-MCP1703AT3302ECB, Arrow Price/Stock=https://www.arrow.com/en/products/mcp1703at-3302ecb/microchip-technology?region=nac, Datasheet Link=http://uk.rs-online.com/web/p/products/7709509, Height=1.45mm, Manufacturer_Part_Number=MCP1703AT-3302E/CB, Mouser Price/Stock=https://www.mouser.co.uk/ProductDetail/Microchip-Technology/MCP1703AT-3302E-CB?qs=PZkJWYMe7leeY97bgTp%252B9w%3D%3D
IC8: "Integrated Circuit", Manufacturer_Name="WIZnet Inc", Mouser Part Number=950-W6100L, Datasheet Link=https://eu.mouser.com/datasheet/2/443/w6100_ds_v104e-1994614.pdf, Height=1.6mm, Manufacturer_Part_Number=W6100L, Mouser Price/Stock=https://www.mouser.co.uk/ProductDetail/WIZnet/W6100L?qs=pUKx8fyJudARLmbJE2EKlA%3D%3D
IC9: "Integrated Circuit", Manufacturer_Name="Texas Instruments", Mouser Part Number=595-CD74HCT238M96, Datasheet Link=http://www.ti.com/lit/gpn/cd74hct238, Height=1.75mm, Manufacturer_Part_Number=CD74HCT238M96, Mouser Price/Stock=https://www.mouser.co.uk/ProductDetail/Texas-Instruments/CD74HCT238M96?qs=xFfolx0DHx1u%2Fks4%2FbIqqQ%3D%3D
IC15: library part SST39SF040-55-4C-NHE, "Integrated Circuit", Manufacturer_Name=Microchip, Mouser Part Number=579-39SF0405CNHE, Arrow Part Number=SST39SF040-55-4C-NHE, Arrow Price/Stock=https://www.arrow.com/en/products/sst39sf040-55-4c-nhe/microchip-technology, Datasheet Link=http://www.microchip.com/mymicrochip/filehandler.aspx?ddocname=en551028, Height=3.556mm, Manufacturer_Part_Number=SST39SF040-55-4C-NHE, Mouser Price/Stock=https://www.mouser.co.uk/ProductDetail/Microchip-Technology/SST39SF040-55-4C-NHE?qs=Ot24P6tC%2FQ41kj5UP%2FTWpA%3D%3D
IC16: "Integrated Circuit", Manufacturer_Name=Nexperia, Mouser Part Number=771-HC4040D652, Arrow Part Number=74HC4040D,652, Arrow Price/Stock=https://www.arrow.com/en/products/74hc4040d652/nexperia?region=nac, Datasheet Link=https://assets.nexperia.com/documents/data-sheet/74HC_HCT4040.pdf, Height=1.75mm, Manufacturer_Part_Number=74HC4040D,652, Mouser Price/Stock=https://www.mouser.co.uk/ProductDetail/Nexperia/74HC4040D652?qs=P62ublwmbi%252BprP5gU1ILjQ%3D%3D
IC17: "Integrated Circuit", Manufacturer_Name=Nexperia, Mouser Part Number=771-74HC02D, Arrow Part Number=74HC02D,652, Arrow Price/Stock=https://www.arrow.com/en/products/74hc02d652/nexperia?region=europe, Datasheet Link=https://assets.nexperia.com/documents/data-sheet/74HC_HCT02.pdf, Height=1.75mm, Manufacturer_Part_Number=74HC02D,652, Mouser Price/Stock=https://www.mouser.co.uk/ProductDetail/Nexperia/74HC02D652?qs=P62ublwmbi%252BFMRIR72pVEA%3D%3D
IC18: library part IC_LOGIC_74LVC1G08_0, "IC Gate AND, 1 Channel, SOT-353", Distributor1 Part No=1845211, Distributor2 Part No=1727-2872-2-ND, Manufacturer1="Diodes Inc", Manufacturer2=Nexperia, Martel Part No=NK0126, ComponentLink1Description=ComponentLinknURL1, ComponentLink1URL=https://www.diodes.com/assets/Datasheets/74LVC1G08.pdf, ComponentLink2Description=ComponentLinknURL2, ComponentLink2URL=https://assets.nexperia.com/documents/data-sheet/74LVC1G08.pdf, Distributor1=Farnell, Distributor2=Digikey, ManuPart1=74LVC1G08SE-7, ManuPart2=74LVC1G08GW,125
IC18: "Integrated Circuit", Manufacturer_Name="Texas Instruments", Mouser Part Number=595-SN74LVC1G04DCKR, Arrow Part Number=SN74LVC1G04DCKR, Arrow Price/Stock=https://www.arrow.com/en/products/sn74lvc1g04dckr/texas-instruments?region=nac, Datasheet Link=http://www.ti.com/lit/ds/symlink/sn74lvc1g04.pdf, Height=1.1mm, Manufacturer_Part_Number=SN74LVC1G04DCKR, Mouser Price/Stock=https://www.mouser.co.uk/ProductDetail/Texas-Instruments/SN74LVC1G04DCKR?qs=dT9u2OTAaVWNPsQmeXyvkg%3D%3D
L1 L2 L3: library part 74279215, "Inductor", Manufacturer_Name="Wurth Elektronik", Mouser Part Number=710-782763800, Datasheet Link=http://componentsearchengine.com/Datasheets/1/74279215.pdf, Height=1.3mm, Manufacturer_Part_Number=782763800, Mouser Price/Stock=https://www.mouser.co.uk/ProductDetail/Wurth-Elektronik/74279215?qs=5twSNpOB8IC%252BebnV0jQtuw%3D%3D
PL11: "Connector", Manufacturer_Name="TE Connectivity", Mouser Part Number=571-5650479-5, Arrow Part Number=5650479-5, Arrow Price/Stock=https://www.arrow.com/en/products/5650479-5/te-connectivity?region=europe, Datasheet Link=https://www.te.com/commerce/DocumentDelivery/DDEController?Action=showdoc&DocId=Customer+Drawing%7F5650479%7FP%7Fpdf%7FEnglish%7FENG_CD_5650479_P.pdf%7F5650479-5, Height=11.61mm, Manufacturer_Part_Number=5650479-5, Mouser Price/Stock=https://www.mouser.co.uk/ProductDetail/TE-Connectivity/5650479-5?qs=xrnNvQC1SKQu%252BZBLSdOcFw%3D%3D
Q1 Q2: library part TRANS_NPN_BC846_0, "Transistor NPN, 65V, 100mA, TO-236AB/SOT23"
R1 R19: library part 920-0030-L, "Resistor 100K 1%  0603"
R2 R3 R18: library part 920-0030-L, "Resistor 2K2 1%  0603", Disti Part Number=2447434, LCSC Part #=C127449, Manufacturer=Multicomp, Power=63mW, Tolerance=0.01, Component Type=Standard, Construction="Thick Film", Cost(£)=0.025, Distributer=Farnell, ManuPart=MCWR06X75R0FTL, RoHS Compliant=YES
R4: library part 920-0030-L, "Resistor 1M 1%  0603", Disti Part Number=2447434, LCSC Part #=C127449, Manufacturer=Multicomp, Power=63mW, Tolerance=0.01, Component Type=Standard, Construction="Thick Film", Cost(£)=0.025, Distributer=Farnell, ManuPart=MCWR06X75R0FTL, RoHS Compliant=YES
R5: library part 920-0030-L, "Resistor 12K 1%  0603", Disti Part Number=2447434, LCSC Part #=C127449, Manufacturer=Multicomp, Power=63mW, Tolerance=0.01, Component Type=Standard, Construction="Thick Film", Cost(£)=0.025, Distributer=Farnell, ManuPart=MCWR06X75R0FTL, RoHS Compliant=YES
R6: library part 920-0030-L, "Resistor 300R 1%  0603", Disti Part Number=2447434, LCSC Part #=C127449, Manufacturer=Multicomp, Power=63mW, Tolerance=0.01, Component Type=Standard, Construction="Thick Film", Cost(£)=0.025, Distributer=Farnell, ManuPart=MCWR06X75R0FTL, RoHS Compliant=YES
R7 R8 R9 R10: library part 920-0030-L, "Resistor 50R 1%  0603", Disti Part Number=2447434, LCSC Part #=C127449, Manufacturer=Multicomp, Power=63mW, Tolerance=0.01, Component Type=Standard, Construction="Thick Film", Cost(£)=0.025, Distributer=Farnell, ManuPart=MCWR06X75R0FTL, RoHS Compliant=YES
R11 R12: library part 920-0030-L, "Resistor 300R 1%  0603"
R13: library part 920-0001-L, "Resistor 0R0 1A Max 0603", Disti Part Number=923-3130, LCSC Part #=C844718, Manufacturer=Vishay, Component Type=Standard, Construction="Thick Film", Cost(£)=0.056, Distributer=Farnell, ManuPart=CRCW06030000Z0EA, Qualified2ndManu=Yageo, Qualified2ndPart=RC0603JR-070RL, RoHS Compliant=YES
R14 R15: library part 920-0030-L, "Resistor 75R 1%  0603", Disti Part Number=2447434, LCSC Part #=C127449, Manufacturer=Multicomp, Power=63mW, Tolerance=0.01, Component Type=Standard, Construction="Thick Film", Cost(£)=0.025, Distributer=Farnell, ManuPart=MCWR06X75R0FTL, RoHS Compliant=YES
SK1: "Ethernet socket - through hole", Disti Part Number=2709018, Manufacturer=Amphenol, Distributer=Farnell, ManuPart=RJHSE-5480
T1: "Transformer", Disti Part Number=652-PT61017PEL, LCSC Part #=C124001, Manufacturer=Bourns, Arrow Price/Stock=https://www.arrow.com/en/products/pt61017pel/bourns?region=europe, Datasheet Link=http://www.bourns.com/docs/Product-Datasheets/pt61017pel.pdf, Distributer=Mouser, Height=5mm, ManuPart=PT61017PEL, Mouser Price/Stock=https://www.mouser.co.uk/ProductDetail/Bourns/PT61017PEL?qs=0rbOLB9uh%252BASY8PB9lbWrQ%3D%3D
X1: library part ABM8-25.000MHZ-D2X-T, "Crystal or Oscillator", Manufacturer_Name=ABRACON, Mouser Part Number=815-ABM825MHZD2XT, Arrow Part Number=ABM8-25.000MHZ-D2X-T, Arrow Price/Stock=https://www.arrow.com/en/products/abm8-25.000mhz-d2x-t/abracon?region=nac, Datasheet Link=https://abracon.com/Resonators/abm8.pdf, Height=0.8mm, Manufacturer_Part_Number=ABM8-25.000MHZ-D2X-T, Mouser Price/Stock=https://www.mouser.co.uk/ProductDetail/ABRACON/ABM8-25.000MHZ-D2X-T?qs=XeJtXLiO41RuPiM7CXbPRQ%3D%3D

## Via types
v1: diameter 23.62, hole 15.75, Top Layer to Bottom Layer, tented both sides, 160 vias
v2: diameter 118.11, hole 102.36, Top Layer to Bottom Layer, 2 vias

## Nets (pads, with @x,y where several pads share a name; then routed paths per layer and width w, separated by ;. In a path a pad name is that pad's centre, name@x,y a point inside that pad or via, vN(x,y) a via of type N, cw(c..) or ccw(c..) an arc to the next point about the centre after c; other vN are vias at no path point)
1v2a: C30.2 IC8.4 L2.2 | length 175.8
  Top Layer w10: L2.2@870.08,1564.96 888.7,1546.34 888.7,1542.4 902.48,1528.62 906.42,1528.62 912.48,1522.56 935.01,1522.56 963.47,1494.09 IC8.4@1014.25,1494.09
1v2d: C19.2 C20.2 C21.2 C22.2 IC8.13 IC8.22 IC8.31 IC8.45 L1.2 L2.1 | length 1183.3
  Top Layer w10: C22.2@1121.72,1685.04 1132.46,1674.29 IC8.45@1132.46,1612.31 ; IC8.45@1131.89,1611.73 1132.8,1610.83 1132.8,1577.82 1135.47,1575.15 1135.47,1556.27 ; C20.2@1238.19,1216.54 1238.84,1216.54 1249.53,1227.22 1249.53,1233.07 1249.54,1277.58 IC8.22@1250,1278.03 ; 1240.16,1326.77 1240.16,1326.14 1251.06,1315.24 1251.06,1306.96 1250.91,1306.81 1250.91,1278.94 IC8.22@1249.88,1277.91 ; 1297.24,1454.72 IC8.31@1347.95,1454.72 1403.54,1454.72 1405.51,1452.76 C21.2@1417.32,1452.76
  Top Layer w15.75: L2.1@769.69,1559.06 777.56,1551.18 v1(818.9,1551.18) ; v1(842.52,1145.67) L1.2@891.73,1145.67 ; L1.2@891.73,1138.41 L1.2@891.73,1145.67 ; IC8.13@1070.87,1258.59 1052.64,1258.59 1010.46,1216.4 984.12,1216.4 C19.2@980.32,1212.6 972.44,1204.72 972.44,1192.91 941.56,1162.03 907.48,1162.03 891.73,1146.29 L1.2@891.73,1145.67 ; IC8.13@1070.95,1279.91 1070.95,1326.86
  Bottom Layer w15.75: v1(818.9,1551.18) 818.9,1480.84 846.46,1453.28 846.46,1151.74 842.52,1147.8 v1(842.52,1145.67)
1v2o: C18.2 IC8.14 L1.1 | length 180.2
  Top Layer w10: C18.2@1066.93,1212.6 1068.9,1212.6 1079.65,1223.35 1079.65,1229.2 1079.65,1233.19 1091.61,1245.16 1091.61,1277.13 IC8.14@1092.52,1278.03
  Top Layer w15.75: L1.1@1005.91,1141.73 1021.62,1157.45 1021.62,1179.1 1047.24,1204.72 1059.06,1204.72 C18.2@1066.93,1212.6
3v3: C12.2 C13.2 C14.2 C15.2 IC6.31 IC6.42 IC7.2 IC8.24 IC8.36 L3.1 R1.2 R3.2 R11.2 R12.2 | length 895.5
  Top Layer w7.87: R11.2@669.29,1135.83 714.57,1135.83 v1(716.54,1133.86)
  Top Layer w10: IC7.2@755.91,1746.06 R1.2@818.9,1746.06 ; v1(842.52,1059.06) C13.2@877.95,1059.06 ; IC6.31@1013.78,1842.99 1014.69,1842.09 1014.69,1811.41 v1(1034.75,1791.34) ; IC6.42@1230.32,1842.99 1230.32,1793.06 1236.22,1787.15 v1(1236.22,1783.46) ; IC8.24@1289.37,1278.03 1289.37,1293.31 IC8.24@1290.28,1294.21 ; v1(1322.83,1641.73) 1325.44,1644.34 1325.44,1658.12 C15.2@1344.49,1677.17 ; C15.2@1346.46,1677.17 1346.46,1554.06 1347.36,1553.15 IC8.36@1347.95,1553.15 ; C14.2@1408.39,1294.21 C14.2@1413.39,1299.21 ; C14.2@1417.32,1299.21 C14.2@1417.32,1304.13 ; v1(1460.63,1338.58) 1460.63,1368.11 R3.2@1470.47,1377.95
  Top Layer w11.81: IC8.24@1290.28,1294.21 C14.2@1408.39,1294.21
  Top Layer w19.68: R12.2@673.23,1545.28 680.12,1538.39 703.04,1538.39 715.78,1525.64 715.78,1524.38 v1(716.54,1523.62) 715.78,1522.87 715.78,1469.72 L3.1@710.63,1464.57 ; C12.2@750.85,1665.35 C12.2@751.97,1665.35 ; IC7.2@752.95,1737.98 752.95,1666.34 C12.2@751.97,1665.35 ; IC7.2@753.94,1738.19 753.94,1744.09 IC7.2@755.91,1746.06 ; v1(787.4,1665.35) C12.2@751.97,1665.35 ; C14.2@1417.32,1304.13 v1(1417.32,1338.58)
3v3a: C16.2 C17.2 C23.2 C24.2 IC8.8 IC8.15 L3.2 T1.2 T1.7 | length 2154.6
  Top Layer w10: L3.2@824.8,1464.57 833.9,1473.66 962.91,1473.66 974.31,1462.26 974.31,1453.12 974.31,1438.98 ; C16.2@940.94,1438.98 974.31,1438.98 ; v1(1074.69,1407.29) 1071,1407.29 1062.94,1415.35 IC8.8@1014.25,1415.35 1013.35,1416.26 982.67,1416.26 974.31,1424.62 974.31,1438.98 ; C17.2@1114.17,1212.6 1112.2,1214.57 IC8.15@1112.2,1278.03 1112.2,1335.45 1146.83,1370.08 v1(1149.65,1370.08)
  Top Layer w15.75: C24.2@728.35,749.29 728.35,700.79 v1(767.72,661.42) 831.69,661.42 ; v1(811.02,1413.39) 811.02,1450.79 L3.2@824.8,1464.57 ; T1.7@831.69,726.38 831.69,661.42 ; 1081.69,666.98 T1.2@1081.69,726.38 ; C23.2@1196.85,740.16 C23.2@1204.72,748.03 ; C23.2@1196.85,748.03 1196.85,712.6 1145.67,661.42 831.69,661.42
  GND w10: v1(1074.69,1407.29) 1112.43,1407.29 v1(1149.65,1370.08)
  Bottom Layer w15.75: v1(767.72,661.42) 767.72,1370.08 v1(811.02,1413.39)
5V: C1.1 C2.1 C4.2 C5.2 C6.2 C8.2 C9.2 C10.2 C11.2 C41.2 IC1.20 IC6.7 IC6.18 IC7.3 IC9.6 IC9.16 IC14.1 IC14.20 IC15.32 IC16.16 IC17.14 IC18.5 PL11.A7 PL11.C9 R19.2 | length 1319.1
  Top Layer w10: v1(753.94,2194.88) R19.2@799.21,2194.88 ; v1(984.25,2212.6) C9.2@1019.68,2212.6 ; IC6.18@1013.78,2141.26 C9.2@1013.78,2202.76 ; v1(1192.91,2212.6) C8.2@1232.28,2212.6 1230.32,2210.63 IC6.7@1230.32,2141.26 ; IC9.6@2272.64,2118.31 2274.7,2116.24 2328.64,2116.24 v1(2330.71,2114.17) ; v1(2334.65,1956.69) 2367.66,1956.69 IC18.5@2368.3,1956.05
  Top Layer w11.81: v1(2039.37,141.73) 2040.35,142.72 2040.35,174.21 IC18.5@2041.34,175.2
  Top Layer w15.75: C11.2@712.17,1892.29 C11.2@713.58,1893.7 ; v1(715.03,1931.56) 715.03,1895.15 C11.2@713.58,1893.7 ; IC7.3@716.64,1823.42 713.98,1826.08 713.98,1893.3 C11.2@713.58,1893.7
  Top Layer w19.68: C2.1@539.37,145.67 551.18,157.48 v1(602.36,157.48) ; v1(1251.77,98.23) 1251.77,59.25 C41.2@1251.58,59.06 IC17.14@1298.35,59.06 ; v1(1586.61,657.48) 1587.2,656.89 1587.2,597.72 IC15.32@1587.8,597.13 ; C6.2@1610.24,55.12 1611.32,56.2 1682.97,56.2 IC16.16@1684.06,57.28 1685.47,55.87 1735.47,55.87 v1(1736.22,55.12) ; v1(1653.54,2082.68) 1690.94,2082.68 1712.6,2104.33 C1.1@1712.6,2110.24 ; v1(1996.06,1185.04) C5.2@2039.37,1185.04 IC14.20@2039.37,1254.33 ; IC9.16@2058.07,1868.31 2059.06,1867.32 C4.2@2059.06,1795.28 v1(2098.43,1795.28) ; v1(2342.52,1255.91) 2343.59,1255.91 2345.16,1254.33 IC14.1@2411.42,1254.33 ; IC1.20@2398.62,776.18 2397.64,777.17 C10.2@2397.64,846.46 v1(2440.94,846.46)
/PIRQ: PL11.C2 Q2.3 R19.1 | length 2247
  Top Layer w10: R19.1@799.21,2135.83 799.21,2038.31 Q2.3@801.84,2035.68
  Bottom Layer w10: v1(799.21,2102.36) 812,2115.15 1095.63,2115.15 1380.72,1830.06 2751.83,1830.06 PL11.C2@2801.18,1780.71
/PRE_IORD: IC14.5 IC18.2@2393.89,1881.25 PL11.B1 | length 1137.4
  Top Layer w10: IC18.2@2393.7,1883.86 2393.7,1799.21 2338.58,1744.09 2338.58,1480.31 2363.89,1455.01 2410.74,1455.01 IC14.5@2411.42,1454.33 2489.84,1454.33 2565.81,1530.3 2625.66,1530.3 2649.22,1553.86 2649.22,1828.75 PL11.B1@2701.18,1880.71
/PS: *?.2@2799.21,1933.07 IC14.2 IC18.2@2116.14,200.79 PL11.C1 | length 2936.5
  Top Layer w7.87: IC18.2@2116.14,200.79 2141.73,200.79 2240.16,299.21 2858.27,299.21 2874.02,314.96 2874.02,1185.75 2829.31,1230.46 ; IC14.2@2411.42,1304.33 2483.07,1304.33 2556.94,1230.46 2829.31,1230.46 ; *?.2@2799.21,1933.07 2799.21,1882.68 PL11.C1@2801.18,1880.71 2870.08,1811.81 2870.08,1271.23 2829.31,1230.46
/PWE_IOWR: IC14.6 PL11.A1 | length 502.5
  Top Layer w10: IC14.6@2411.42,1504.33 2492.52,1504.33 2547.9,1559.71 2547.9,1827.43 PL11.A1@2601.18,1880.71
/RST: PL11.B4
B/PRE_IORD: IC6.17 IC14.15 IC15.24 IC17.2 | length 3170.6
  Top Layer w10: IC6.17@1033.46,2141.26 1033.46,2094 1031.7,2092.24 1031.7,2070.66 v1(1051.18,2051.18) ; v1(1405.51,114.17) 1407.09,112.6 1538.29,112.6 IC17.2@1539.86,111.02 ; IC15.24@1430.79,904.33 1431.24,904.78 1506.74,904.78 v1(1507.19,905.23) ; v1(1976.38,1507.87) 1978.15,1506.1 2037.6,1506.1 IC14.15@2039.37,1504.33
  Bottom Layer w10: v1(1051.18,2051.18) 1051.18,2047.5 1065.68,2032.99 1065.68,2022.79 1446.74,1641.73 1842.52,1641.73 v1(1976.38,1507.87) 1976.38,1374.42 v1@1507.47,905.51 ; v1(1405.51,114.17) 1405.51,572.4 1437.01,603.9 1437.01,842.02 1442.27,847.28 1442.27,851.72 1493.17,902.62 1504.58,902.62 v1(1507.19,905.23)
B/PS: IC1.19 IC14.18 | length 851.2
  Top Layer w10: IC14.18@2039.37,1354.33 2098.43,1354.33 2322.83,1129.92 2322.83,734.2 2330.86,726.18 IC1.19@2398.62,726.18
B/PWE_IOWR: IC6.16 IC14.14 IC15.31 IC17.6 | length 3178.4
  Top Layer w10: IC6.16@1053.15,2141.26 1053.79,2140.62 1053.79,2083.47 v1(1054.42,2082.83) ; IC17.6@1539.86,311.02 1532.07,318.82 1497.98,318.82 1492.13,324.68 1492.13,507.87 1535.12,550.87 1535.12,594.45 1540.18,599.51 1540.18,654.35 v1(1633.86,748.03) ; IC14.14@2039.37,1554.33 2047.17,1546.54 2088.7,1546.54 2095.3,1539.93 v1(2098.99,1539.93)
  Bottom Layer w10: v1(1054.42,2082.83) 1081.59,2055.66 1081.59,2029.38 1453.33,1657.64 1990.92,1657.64 v1@2103.81,1544.75 ; v1(1633.86,748.03) 1633.86,750.29 1655.22,771.65 1716.54,771.65 1731.34,756.85 1974.02,756.85 2133.86,916.69 2133.86,1514.7 v1@2103.81,1544.75 ; v1(2098.99,1539.93) v1@2103.81,1544.75
B/RST: IC6.19 IC17.11 | length 2123.2
  Top Layer w10: IC6.19@994.09,2141.26 994.09,2068.9 v1(1039.37,2023.62) ; IC17.11@1326.32,211.02 1327.11,211.81 1365.35,211.81 v1(1366.14,212.6)
  Bottom Layer w10: v1(1039.37,2023.62) 1366.14,1696.85 v1(1366.14,212.6)
BD0: IC1.11 PL11.C14 | length 712.5
  Top Layer w10: IC1.11@2398.62,326.18 2826.18,326.18 2850.39,350.39 2850.39,531.5 PL11.C14@2801.18,580.71
BD1: IC1.12 PL11.A14 | length 511.2
  Top Layer w10: IC1.12@2398.62,376.18 2348.23,376.18 2322.99,401.42 2322.99,525.46 2339.62,542.09 2340.17,542.09 2347.97,549.88 2561.94,549.88 2592.76,580.71 PL11.A14@2601.18,580.71
BD2: IC1.13 PL11.A15 | length 396.8
  Top Layer w10: IC1.13@2398.62,426.18 2344.76,426.18 2338.9,432.04 2338.9,494.02 2344.76,499.88 2566.02,499.88 2585.19,480.71 PL11.A15@2601.18,480.71
BD3: IC1.14 PL11.A16 | length 242.1
  Top Layer w10: IC1.14@2398.62,476.18 2505.71,476.18 PL11.A16@2601.18,380.71
BD4: IC1.15 PL11.C16 | length 492
  Top Layer w10: IC1.15@2398.62,526.18 2401.69,529.25 2625.7,529.25 2649.72,505.23 2649.72,459.83 2678.57,430.99 2750.9,430.99 PL11.C16@2801.18,380.71
BD5: IC1.16 PL11.C15 | length 512.4
  Top Layer w10: IC1.16@2398.62,576.18 2404.94,582.5 2527.38,582.5 2575.38,630.5 2622.16,630.5 2651.18,601.48 2651.18,558.34 2680.3,529.22 2752.67,529.22 PL11.C15@2801.18,480.71
BD6: IC1.17 PL11.B14 | length 603
  Top Layer w10: IC1.17@2398.62,626.18 2392.7,632.11 2352.15,632.11 2334.65,649.61 2334.65,694.17 2342.95,702.48 2548.94,702.48 2575.89,729.43 2624.16,729.43 2651.06,702.53 2651.06,635.72 2701.18,585.59 PL11.B14@2701.18,580.71
BD7: IC1.18 PL11.A13 | length 204.4
  Top Layer w10: IC1.18@2398.62,676.18 2400.89,678.44 2598.92,678.44 PL11.A13@2601.18,680.71
BD8: PL11.B12
BD9: PL11.C12
BD10: PL11.A11
BD11: PL11.C11
BD12: PL11.A10
BD13: PL11.B10
BD14: PL11.C10
BD15: PL11.A9
BLA2: IC6.13 IC14.17 IC15.4 | length 2822.6
  Top Layer w10: v1(1104.31,2042.22) 1106.91,2044.83 1106.91,2067.83 1113.11,2074.03 1113.11,2140.35 IC6.13@1112.2,2141.26 ; v1(1703.62,747.6) 1703.62,743.91 1717.04,730.49 1717.04,716.03 1787.41,645.67 1787.41,597.52 IC15.4@1787.8,597.13 ; IC14.17@2039.37,1404.33 2040.75,1402.95 2159.13,1402.95 v1(2160.51,1401.57)
  Bottom Layer w10: v1(1104.31,2042.22) 1348.28,1798.25 1381.3,1798.25 1506,1673.54 1997.51,1673.54 2160.51,1510.54 v1(2160.51,1401.57) 2160.51,901.06 2000.39,740.94 1724.75,740.94 1720.7,744.99 1706.22,744.99 v1(1703.62,747.6)
BLA3: IC6.14 IC14.16 IC15.28 | length 2980.1
  Top Layer w10: v1(1086.22,2092.43) 1086.22,2096.12 1091.61,2101.51 1091.61,2140.35 IC6.14@1092.52,2141.26 ; IC15.28@1430.79,704.33 1483.86,704.33 1501.33,721.8 1521.02,721.8 v1(1523.62,724.41) ; IC14.16@2039.37,1454.33 2040.55,1455.51 2183.86,1455.51 v1(2185.04,1456.69)
  Bottom Layer w10: v1(1086.22,2092.43) 1364.5,1814.15 1387.89,1814.15 1512.59,1689.45 2004.09,1689.45 2185.04,1508.5 2185.04,1176.75 2184.25,1175.96 2184.25,902.31 2006.98,725.04 1720.52,725.04 1720.36,724.88 v1@1524.09,724.88
BLA12: IC14.11
BLA13: IC14.12
BPR/W: IC1.1 IC9.2 IC14.13 IC18.4@2419.48,1956.05 | length 1626.4
  Top Layer w10: v1(1964.57,779.57) 1966.26,777.87 2024.88,777.87 IC1.1@2026.57,776.18 ; v1(1986.22,1604.33) IC14.13@2039.37,1604.33 2100.39,1604.33 2326.85,1830.79 2326.85,1918.31 IC9.2@2272.64,1918.31 ; 2326.85,1918.39 2406.57,1918.39 2416.61,1928.42 2416.61,1955.98 IC18.4@2419.29,1958.66
  Bottom Layer w10: v1(1964.57,779.57) 2019.68,834.65 2019.68,1571.07 1986.43,1604.33 v1(1986.22,1604.33)
CLEAR: IC16.11 IC17.10 | length 376.9
  Top Layer w10: IC17.10@1326.32,261.02 1477.56,261.02 1501.26,284.72 1583.94,284.72 1606.5,307.28 IC16.11@1684.06,307.28
COUNT: IC16.10 IC17.1 | length 489.8
  Top Layer w10: IC17.1@1539.86,61.02 1547.66,68.82 1575.76,68.82 1581.61,74.68 1581.61,151.12 1615.32,184.83 1615.32,198.26 1649.03,231.97 1718.45,231.97 1748.19,261.7 1748.19,333.33 1729.57,351.95 1689.39,351.95 IC16.10@1684.06,357.28